# Altium PCB Wifi_RGB_v1.PcbDoc
Units mil, origin at the board's own origin, x right, y up, seen from the top; angles counter-clockwise.
Board outline 1712.6 x 1102.36 mil, 2 copper layers (Top Layer, Bottom Layer); 24 components, 18 nets, 79 pads, 11 vias.
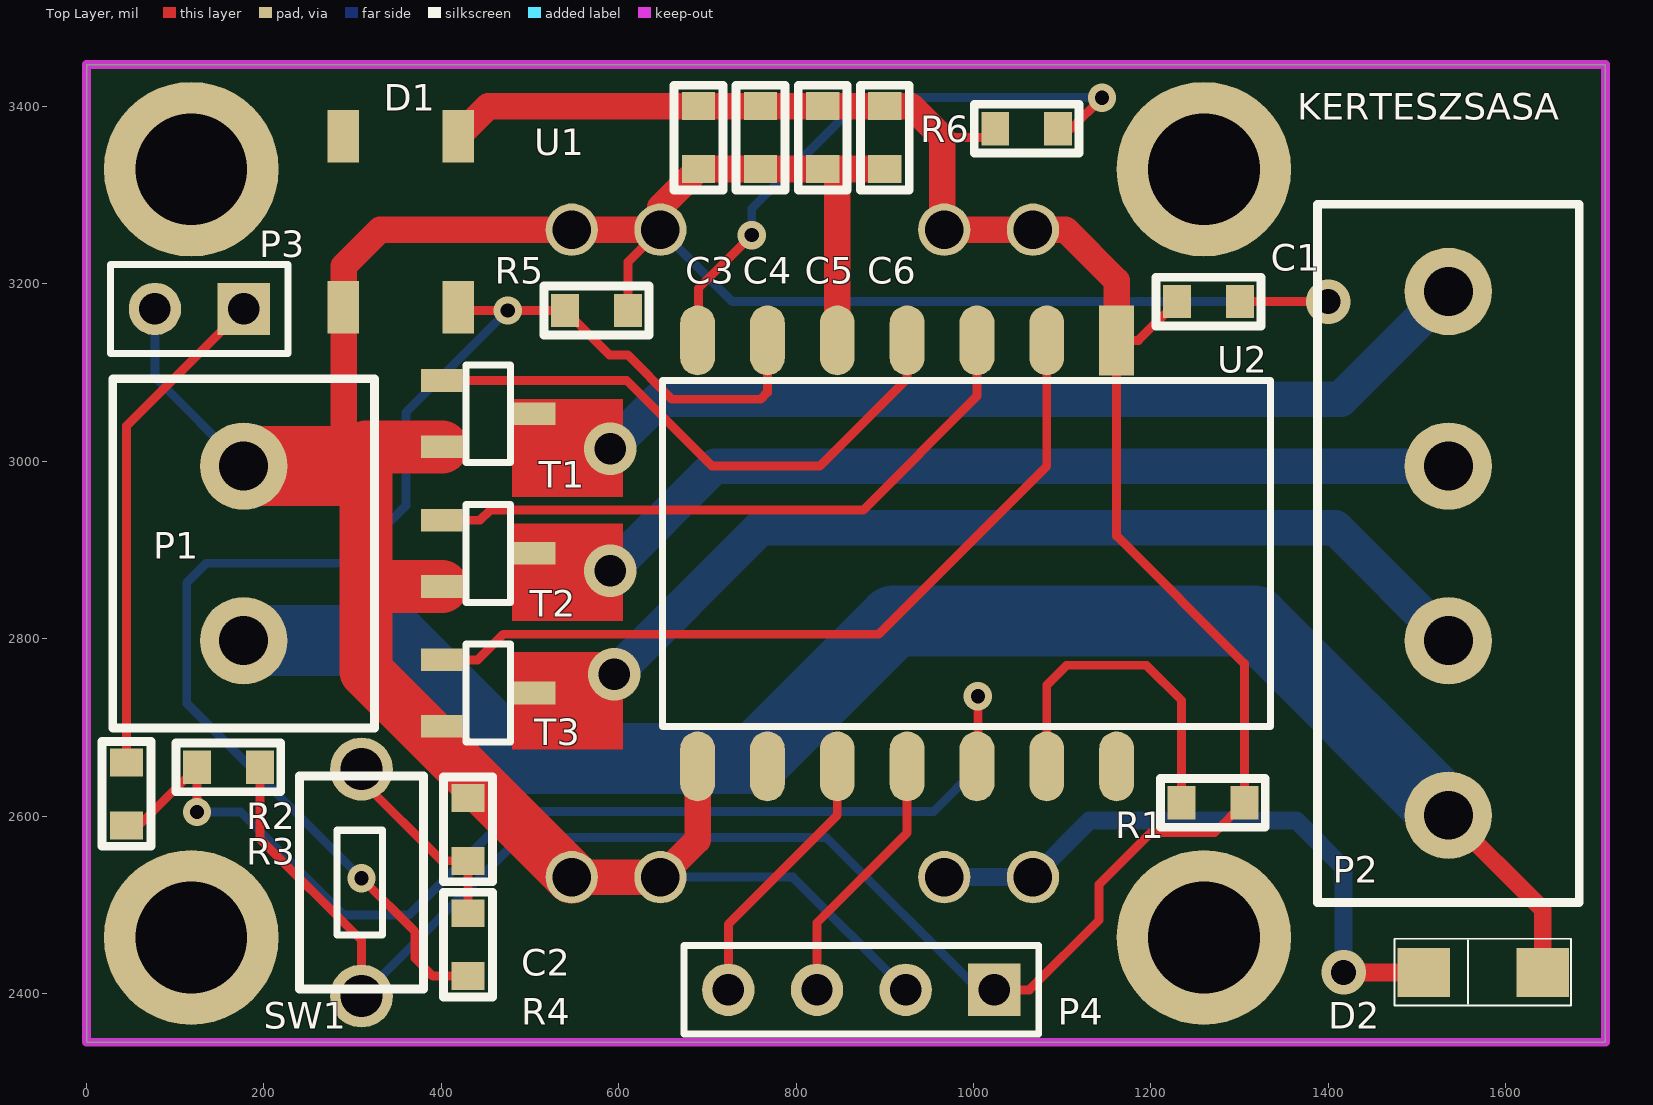
[diagram p0: Top Layer view]
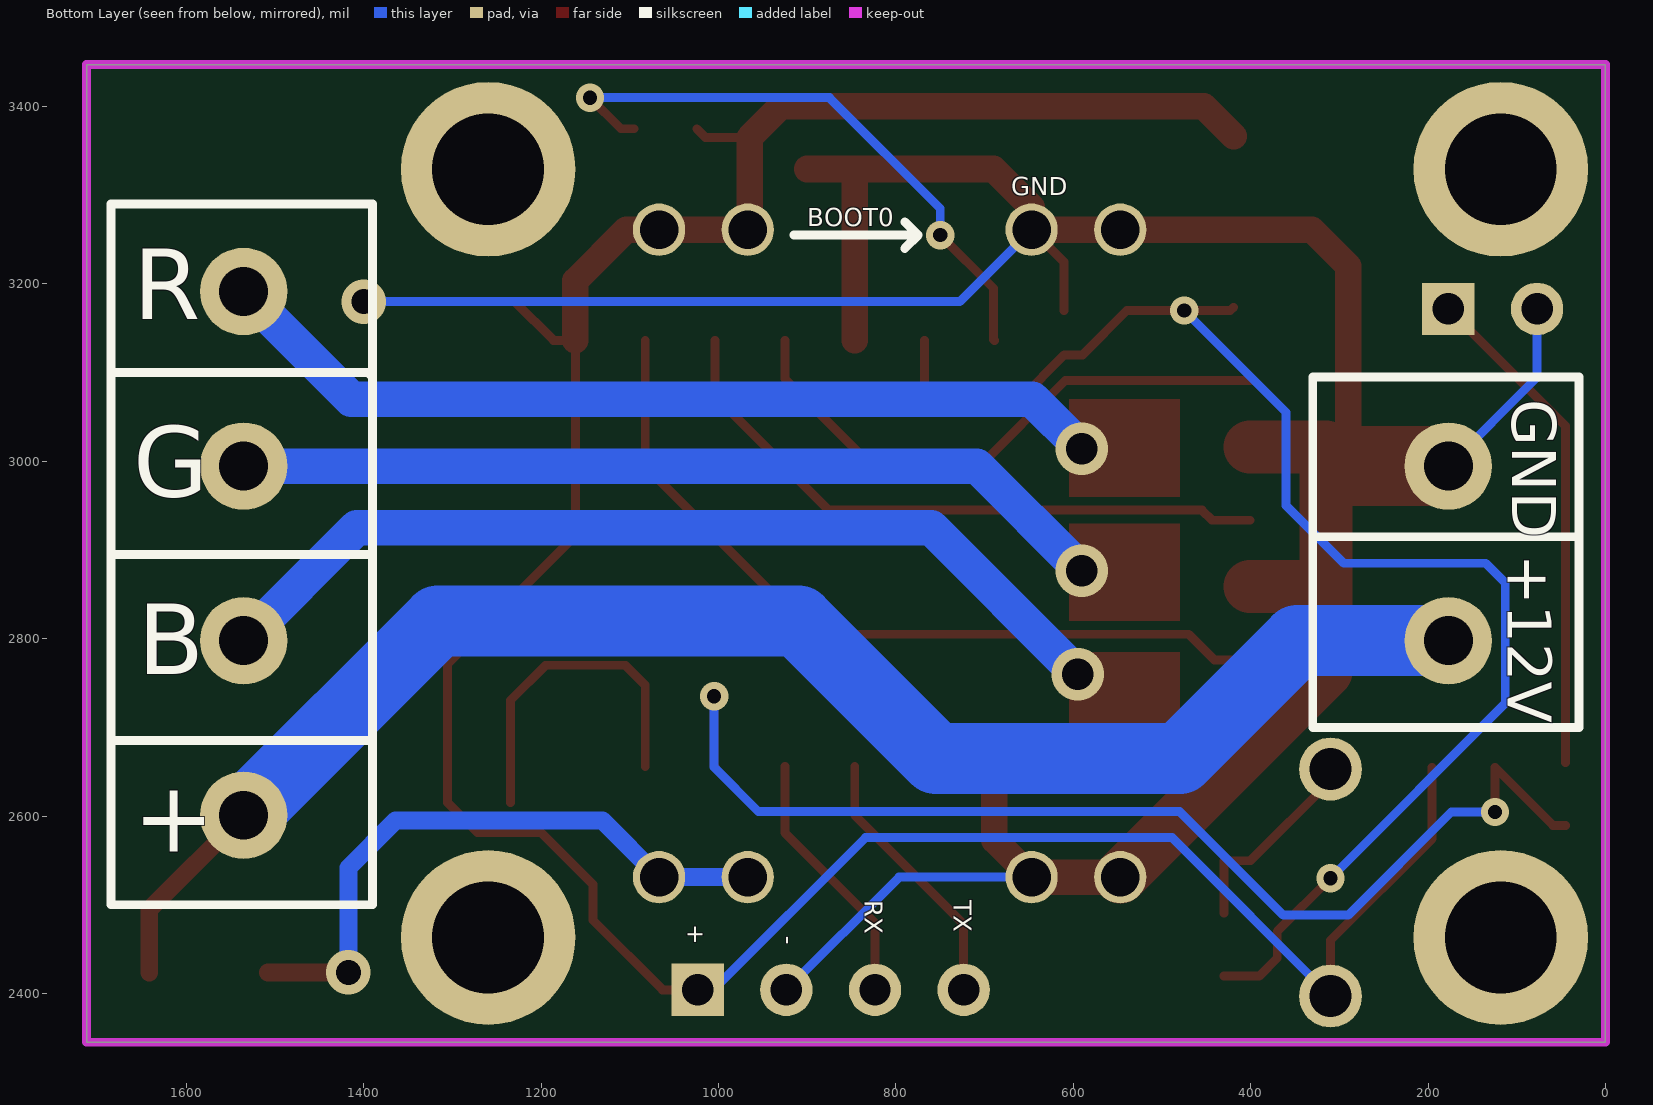
[diagram p1: Bottom Layer view, seen from below]

## Layer stack, top to bottom
Top Layer: signal copper 1.4
Dielectric: dielectric 12.6, FR-4, Dk 4.8
Bottom Layer: signal copper 1.4

## Board outline
0,2345 1712.6,2345 1712.6,3447.36 0,3447.36

## Design rules (kind name [scope] priority, off if disabled: settings)
Clearance [All] p1: gap=10
PolygonConnect [All] p1: connectstyle=Relief reliefconductorwidth=10 reliefentries=4 polygonreliefangle="90 Angle"
RoutingVias [All] p1: holewidth=28 width=50 viastyle="Through Hole" minholewidth=28 minwidth=50 maxholewidth=28 maxwidth=50
SilkscreenOverComponentPads [All] p1: minsilkscreentomaskgap=10
SolderMaskExpansion [All] p1: expansion=4
Width [All] p1: maxlimit=100 minlimit=10 preferedwidth=10
27 further rules are at their usual default settings.

## Components (designator, comment, footprint, x,y, rotation, side; value= is the part's Value field where it differs from the comment)
C1 "100nF" FP_0603_CAP_080 1265,3180 r0 top
C2 "100nF" FP_0603_CAP_080 430,2585 r90 top
C3 "100nF" FP_0603_CAP_080 690,3365 r270 top
C4 "100nF" FP_0603_CAP_080 760,3365 r270 top
C5 "100nF" FP_0603_CAP_080 830,3365 r270 top
C6 "100nF" FP_0603_CAP_080 900,3365 r270 top
D1 "WS2812B" LED_5050_4pin 354.33,3270.2 r270 top
D2 "SIML" subsma 1574.8,2423.74 r90 top
P1 "Header 2" "Sorkapocs 2P 5mm" 177.17,2896.18 r90 top
P2 "Header 4" "Sorkapocs 4P 5mm" 1535.43,2896.18 r270 top
P3 "INPUT" HDR1X2 177.17,3171.77 r180 top
P4 "Header 4" HDR1X4 1023.62,2404.06 r180 top
R1 "1K" FP_0603_RES 1270,2615 r180 top
R2 "1K" FP_0603_RES 160,2655 r180 top
R3 "1K" FP_0603_RES 45,2625 r270 top
R4 "1K" FP_0603_RES 430,2455 r270 top
R5 "1K" FP_0603_RES 575,3170 r0 top
R6 "1K" FP_0603_RES 1060,3375 r180 top
SW1 "SW_tactile_2pin" SW_TACT_2PIN 310,2525 r90 top
T1 "Type" FET_SOT23 452.76,3053.66 r180 top
T2 "Type" FET_SOT23 452.76,2896.18 r180 top
T3 "Type" FET_SOT23 452.76,2738.7 r180 top
U1 "dc-dc" "DC-DC modul" 807.09,2896.18 r90 top
U2 "ESP-3" ESP_3 925.2,2896.18 r270 top

## Footprints (in the part's own frame and the unit in brackets; to place one, negate y for a bottom-side part, rotate by r counter-clockwise, add the part's x,y. Pads: shape width x height; smd on the part's side, far side on the other; paste and mask are expansions set on the pad)
"DC-DC modul" [mm]
  round 1.5 hole 1.1: 1(-9.271,4.064) 1(-9.271,6.604) 2(-9.271,-6.604) 2(-9.271,-4.064) 3(9.271,-6.604) 3(9.271,-4.064) 4(9.271,4.064) 4(9.271,6.604)
  body extent -11.05,-8.38 11.05,8.38, height 4.54
ESP_3 [mm]
  rect 2x1 smd: 1(-6.1,6)
  oval 2x1 smd: 2(-6.1,4) 3(-6.1,2) 4(-6.1,0) 5(-6.1,-2) 6(-6.1,-4) 7(-6.1,-6) 8(6.1,-6) 9(6.1,-4) 10(6.1,-2) 11(6.1,0) 12(6.1,2) 13(6.1,4) 14(6.1,6)
  silkscreen extent -4.95,-7 4.95,10.4, body extent -6.1,-7 6.1,10.4, height 2
FET_SOT23 [mm] "SOT23-3 tok"
  rect 1.2x0.65 smd: D(-1.327,0) G(1.327,-0.95) S(1.327,0.95)
  silkscreen extent -0.64,-1.4 0.64,1.4, body extent -1.27,-1.46 1.27,1.46, height 0.97
FP_0603_CAP_080 [mm] "0.8mm magas 0603 kapacitás"
  rect 0.8x0.95 smd: 1(-0.9,0) 2(0.9,0)
  silkscreen extent -1.5,-0.7 1.5,0.7, body extent -0.8,-0.4 0.76,0.4, height 0.8
FP_0603_RES [mm] "0603 ellenállás"
  rect 0.8x0.95 smd: 1(-0.9,0) 2(0.9,0)
  silkscreen extent -1.5,-0.7 1.5,0.7, body extent -0.8,-0.4 0.8,0.4, height 0.44
HDR1X2 [mm] "Connector; Header; 2 Position"
  rect 1.5x1.5 hole 0.9: 1(0,0)
  round 1.5 hole 0.9: 2(2.54,0)
  silkscreen extent -1.27,-1.27 3.81,1.27
HDR1X4 [mm] "Connector; Header; 4 Position"
  rect 1.5x1.5 hole 0.9: 1(0,0)
  round 1.5 hole 0.9: 2(2.54,0) 3(5.08,0) 4(7.62,0)
  silkscreen extent -1.27,-1.27 8.89,1.27
LED_5050_4pin [mm]
  rect 1.5x0.9 smd: 1(-2.45,1.65) 2(-2.45,-1.65) 3(2.45,-1.65) 4(2.45,1.65)
  body extent -2.65,-2.5 2.65,2.5, height 1.6
"Sorkapocs 2P 5mm" [mm]
  round 2.5 hole 1.4: 1(-2.5,0) 2(2.5,0)
  silkscreen extent -5,-3.75 5,3.75, body extent -5,-4.5 5,4.5, height 15.2
"Sorkapocs 4P 5mm" [mm]
  round 2.5 hole 1.4: 1(-7.5,0) 2(-2.5,0) 3(2.5,0) 4(7.5,0)
  silkscreen extent -10,-3.75 10,3.75, body extent -10,-4.5 10,4.5, height 15.2
subsma [mm] "nagyfesz egyeniranyito"
  rect 1.4x1.5 smd: A(0,-1.7) K(0,1.7)
  silkscreen extent -0.95,-2.51 0.97,2.54, body extent -0.9,-1.77 0.9,1.93, height 1.35
SW_TACT_2PIN [mm]
  round 1.8 hole 1.2: 1(-3.25,0) 2(3.25,0)
  silkscreen extent -3.05,-1.78 3.05,1.78, body extent -3.75,-1.78 3.75,1.78, height 4.3

## Part data
C1 C2 C3 C4 C5 C6: library part Cap, "Capacitor"
D2: library part DIODE_big
P1: "Header, 2-Pin"
P2 P4: "Header, 4-Pin"
P3: library part "Header 2", "Header, 2-Pin"
R1 R2 R3 R4 R5 R6: library part Res3, "Resistor"
T1 T2 T3: library part NMOS
U1: library part "DC-DC modul", "Step down dc-dc module"
U2: "ESP-3wifi module"

## Free pads (board coordinates)
  round 196.85 hole 125.98: 0(118.11,2463.11) 0(118.11,3329.25) 0(1259.84,2463.11) 0(1259.84,3329.25)

## Via types
v1: diameter 32, hole 16, Top Layer to Bottom Layer, 6 vias
v2: diameter 59.06, hole 35.43, Top Layer to Bottom Layer, 3 vias
v3: diameter 50, hole 28, Top Layer to Bottom Layer, 2 vias

## Nets (pads, with @x,y where several pads share a name; then routed paths per layer and width w, separated by ;. In a path a pad name is that pad's centre, name@x,y a point inside that pad or via, vN(x,y) a via of type N, cw(c..) or ccw(c..) an arc to the next point about the centre after c; other vN are vias at no path point)
3V3: C1.1 C3.1 C4.1 C5.1 C6.1 D1.1 P4.1 R1.1 R2.1 R6.2 SW1.1 U1.3 U2.1 | length 3252.3
  Top Layer w10: R2.1 195.43,2574.57 310,2460 SW1.1 ; 965,3365 1014.57,3365 R6.2 ; P4.1 1062.99,2404.06 1141.73,2482.8 1141.73,2523.03 1200,2581.3 1271.73,2581.3 R1.1 1305.43,2771.85 1161.42,2915.87 U2.1 1185.91,3136.34 C1.1
  Top Layer w30: D1.1 453.07,3400.43 C3.1 C4.1 C5.1 C6.1 929.57,3400.43 965,3365 965,3263.27 967.09,3261.18 1067.09,3261.18 1103.82,3261.18 1161.42,3203.58 U2.1
  Bottom Layer w10: SW1.1 488.66,2575.71 834.29,2575.71 1005.94,2404.06 P4.1
12V: D2.A P1.1 P2.4 | length 1789.4
  Top Layer w20: P2.4 1641.73,2494.61 D2.A
  Bottom Layer w80: P1.1 347.24,2797.76 480,2665 755,2665 910,2820 1316.34,2820 P2.4
B: T3.G U2.2 | length 914.4
  Top Layer w10: T3.G 441.1,2776.1 470,2805 893.07,2805 1082.68,2994.61 U2.2
BLUE: P2.3 T3.D | length 1061.5
  Bottom Layer w40: v2(595,2760) 760,2925 1408.19,2925 P2.3
BUTTON: P3.1 R3.1 | length 566.1
  Top Layer w10: R3.1 45,3039.61 P3.1
G: T2.G U2.3 | length 724.3
  Top Layer w10: T2.G 443.58,2933.58 455,2945 875.59,2945 1003.94,3073.35 U2.3
GIO0: R6.1 U2.7 | length 684.8
  Top Layer w10: U2.7 690,3137.36 690,3195 v1(750,3255) ; R6.1 1110,3375 v1(1145,3410)
  Bottom Layer w10: v1(750,3255) 750,3285 875,3410 v1(1145,3410)
GND: C1.2 C2.2 C3.2 C4.2 C5.2 C6.2 D1.3 P1.2 P3.2 P4.2 R5.2 T1.S T2.S T3.S U1.1 U1.4 U2.5 U2.8 | length 3711.2
  Top Layer w10: D1.3 D1.3@290,3174.37 ; R5.2 610.43,3224.53 U1.4@647.09,3261.18 ; C1.2 1390,3180 1400,3190 v3(1400,3180)
  Top Layer w30: P1.2 P1.2@177.17,3012.17 ; 290,3020 290,3174.37 290,3220 331.18,3261.18 547.09,3261.18 647.09,3261.18 647.09,3286.65 C3.2 C4.2 C5.2 C6.2 ; U1.1@647.09,2531.18 688.98,2573.07 U2.8 ; U2.5 C5.2@846.46,3325
  Top Layer w40: U1.1@547.09,2531.18 U1.1@647.09,2531.18
  Top Layer w60: 315,2985 315,2858.78 ; 315,3016.26 T1.S ; T2.S 315,2858.78 ; U1.1@547.09,2531.18 315,2763.27 315,2858.78
  Top Layer w90: P1.2 293.35,2994.61
  Bottom Layer w10: P3.2 77.17,3094.61 P1.2 ; U1.1@647.09,2531.18 796.5,2531.18 P4.2 ; U1.4@647.09,3261.18 728.27,3180 v3(1400,3180)
GREEN: P2.2 T2.D | length 993.8
  Bottom Layer w40: v2(590.55,2876.5) 708.66,2994.61 P2.2
LED: D1.4 R4.2 R5.1 U2.6 | length 1601.8
  Top Layer w10: v1(310,2530) 370,2470 370,2440 390.43,2419.57 R4.2 ; D1.4 423.03,3170 v1(475,3170) R5.1 589.57,3120 610,3120 660,3070 760,3070 767.72,3077.72 U2.6
  Bottom Layer w10: v1(310,2530) 112.95,2727.05 112.95,2862.95 135,2885 295,2885 360,2950 360,3055 v1(475,3170)
NetC2_1: C2.1 R4.1 SW1.2 | length 229.5
  Top Layer w10: SW1.2 310,2640 400.43,2549.57 C2.1 R4.1
NetD2_K: D2.K U1.2 | length 707.3
  Top Layer w20: v3(1417.32,2423.74) D2.K
  Bottom Layer w20: U1.2@967.09,2531.18 1067.09,2531.18 1130.91,2595 1364.17,2595 1417.32,2541.85 v3(1417.32,2423.74)
NetR1_2: R1.2 U2.13 | length 384.6
  Top Layer w10: U2.13 1082.68,2747.68 1105,2770 1195,2770 1234.57,2730.43 R1.2
NetR2_2: R2.2 R3.2 U2.12 | length 1320.6
  Top Layer w10: R3.2 59.13,2589.57 R2.2 v1(124.57,2604.57) v1@120,2600 ; U2.12 1005,2657.09 v1(1005,2735)
  Bottom Layer w10: v1(124.57,2604.57) 173.8,2604.57 290,2488.37 363.37,2488.37 480,2605 955,2605 1005,2655 v1(1005,2735)
R: T1.G U2.4 | length 648.7
  Top Layer w10: T1.G 608.94,3091.06 705.39,2994.61 826.77,2994.61 925.2,3093.03 U2.4
RED: P2.1 T1.D | length 1018.3
  Bottom Layer w40: v2(590.55,3014.29) 646.26,3070 1413.98,3070 P2.1
RX: P4.3 U2.11 | length 294
  Top Layer w10: P4.3 823.62,2479.65 925.2,2581.22 U2.11
TX: P4.4 U2.10 | length 302.8
  Top Layer w10: P4.4 723.62,2478.07 846.46,2600.91 U2.10
pads on no net: D1.2 U2.9 U2.14

## Keep-outs
Keep-Out Layer:
  the board outline again, w10

## Other copper
Top Layer:
  rectangle net BLUE: 480,2675 605,2785
  rectangle net GREEN: 480,2820 605,2930
  rectangle net RED: 480,2960 605,3070

## Silkscreen, mask and mechanical layers (free items; w line width, h text height)
Top Overlay:
  text "KERTESZSASA" at 1365,3385 h30
Bottom Overlay:
  lines w10: 30,2915 330,2915 ; 790,3240 775,3255 ; 790,3270 775,3255 ; 915,3255 775,3255 ; 1390,2685 1685,2685 ; 1390,2895 1685,2895 ; 1390,3095 1395,3100 1685,3100 ; 30,2700 30,3095 330,3095 330,2700 30,2700 ; 1390,2500 1390,3290 1685,3290 1685,2500 1390,2500
  text "GND" at 670,3300 h20
  text "BOOT0" at 900,3265 h20
  text "R" at 1660,3160 h80
  text "GND" at 105,3070 h50 r90
  text "G" at 1660,2960 h80
  text "+12V" at 110,2895 h50 r90
  text "B" at 1655,2760 h80
  text "+" at 1660,2560 h80
  text "TX" at 735,2505 h20 r90
  text "RX" at 835,2505 h20 r90
  text "-" at 930,2455 h20 r90
  text "+" at 1035,2455 h20 r90